# EAGLE board led (EAGLE 9.5.0)
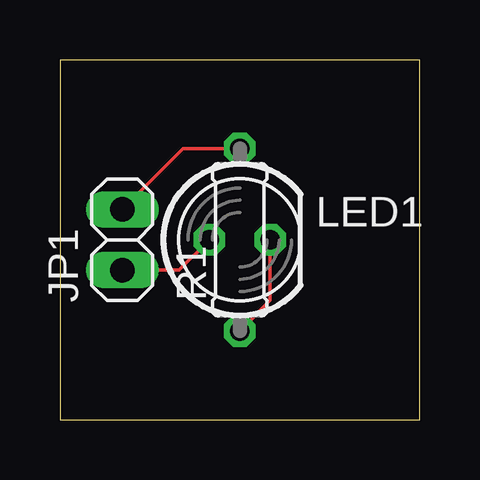
[diagram p0: board, top side]

Size 15 x 15 mm. Coordinates in mm from the lower left corner, seen from the top.
Outline: 0,0 15,0 15,15 0,15 0,0
Copper layers (1*16): Top 0.035mm / dielectric 1.5mm / Bottom 0.035mm
Design rules "default": minimum track width 6mil, minimum drill 0.35mm, track to track 6mil, track to pad 6mil, pad to pad 6mil, via to via 6mil, smd to smd 6mil, copper to edge 40mil, drill to drill 6mil, minimum pad ring 10mil, minimum via ring 8mil, stop-mask expansion 4mil, vias tented up to drill 0mil, thermal gap 10mil

## Footprints (pad centres in the part's own frame; a part is rotated, then mirrored left to right if it is on the bottom)
1X02 = drill 1.016 long: 1 -1.27,0; 2 1.27,0
LED5MM = drill 0.813 octagon: A -1.27,0; K 1.27,0
0207/7 = drill 0.813 octagon: 1 -3.81,0; 2 3.81,0

## Placement (x,y rotation side)
JP1  [1X02]  2.6,7.5 90 top
LED1  [LED5MM]  7.5,7.5 0 top
R1  [0207/7]  7.5,7.5 90 top

## Library data of the parts
JP1 = pinhead
LED1 = led
R1 = rcl; SPICEPREFIX: R

## Nets
N$1: LED1.K R1.1
N$2: JP1.1 LED1.A
N$3: JP1.2 R1.2

## Tracks (layer width: path | path; a pad name or v marks a point on that pad's centre or on a via)
N$1
  Top 0.152: LED1.K 8.77,4.96 R1.1
N$2
  Top 0.152: JP1.1 4.96,6.23 LED1.A
N$3
  Top 0.152: JP1.2 5.14,11.31 R1.2